# EAGLE board esquema (EAGLE 9.6.2)
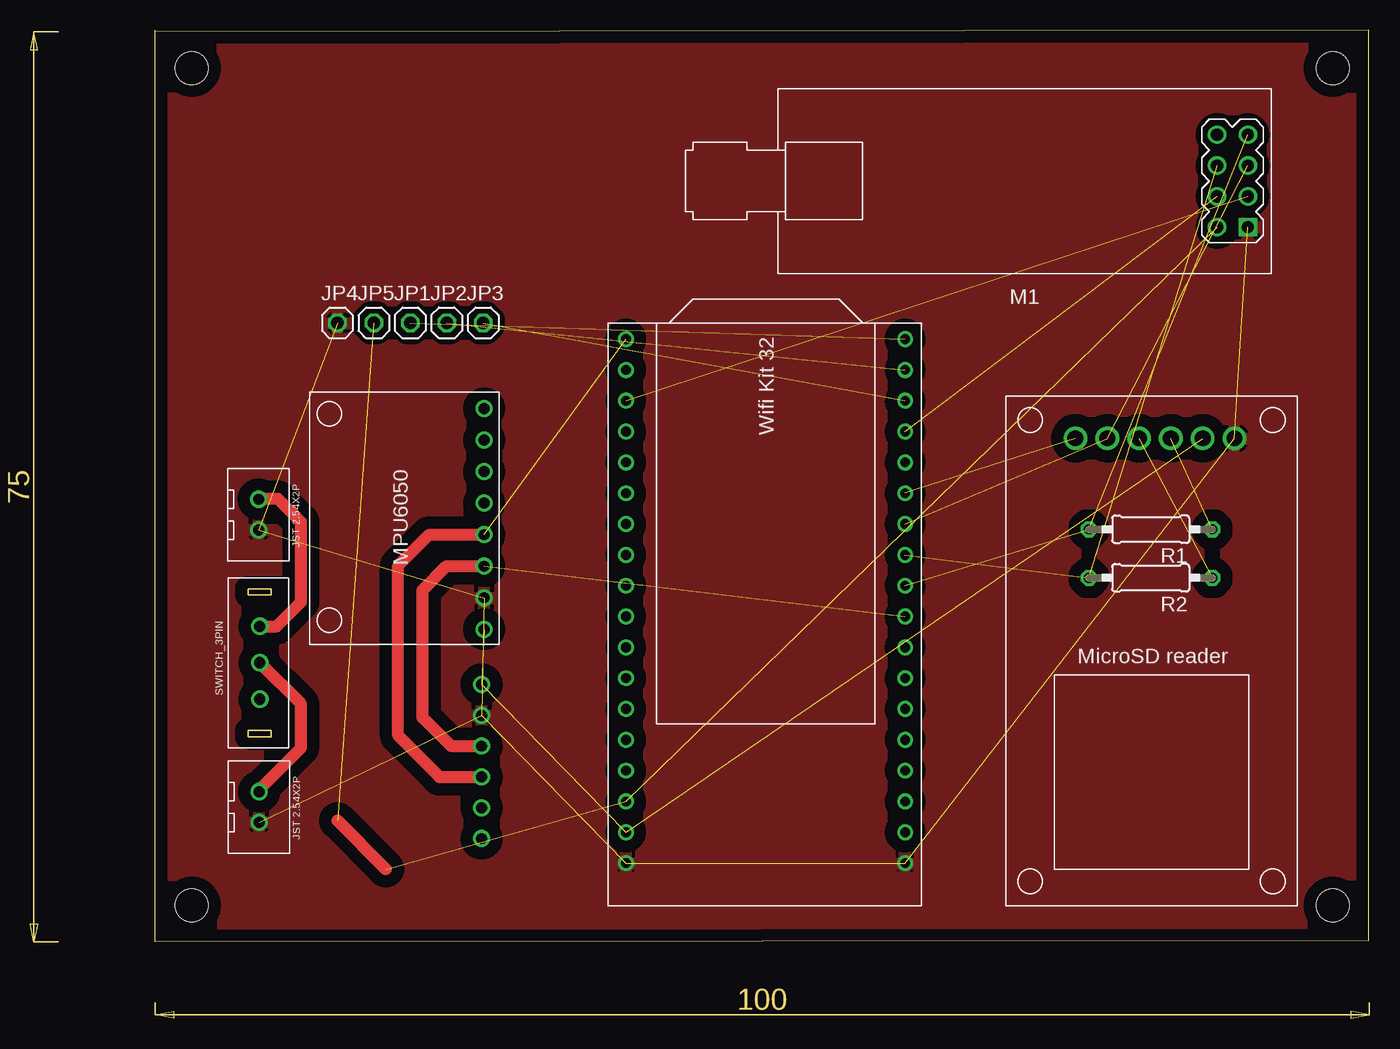
[diagram p0: board, top side]
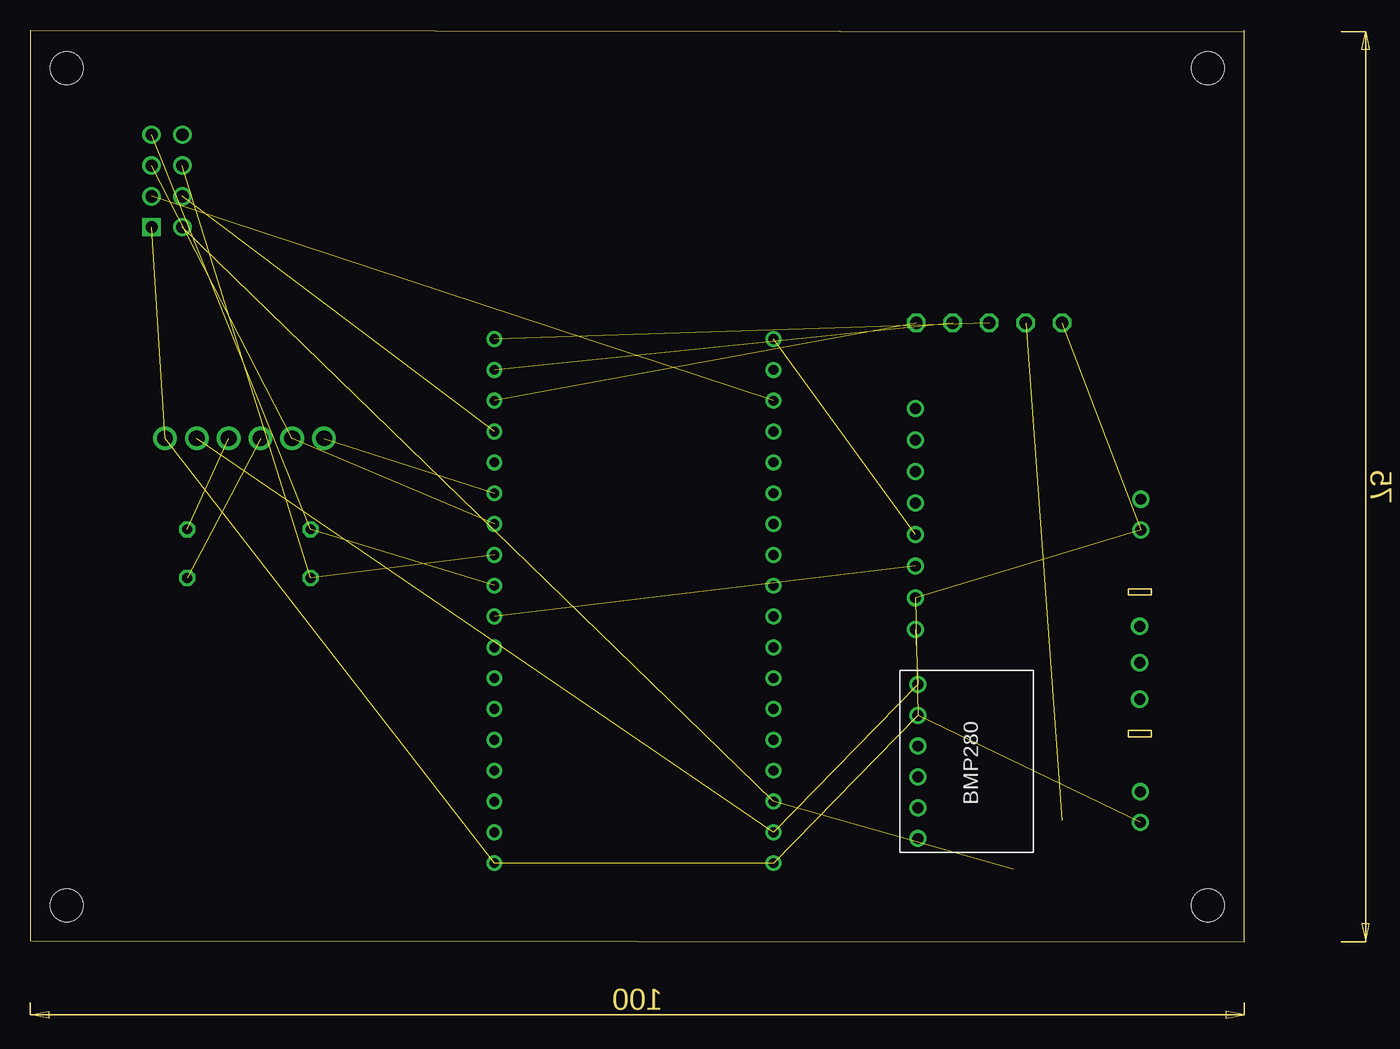
[diagram p1: board, bottom side, seen from below]

Size 100 x 75.1 mm. Coordinates in mm from the lower left corner, seen from the top.
Outline: 0.03,75 100,75.1 100,0.1 0.03,0
Outline: 0,0.01 0,75.1
Copper layers (1*16): Top 0.035mm / dielectric 1.5mm / Bottom 0.035mm
Design rules "default *": minimum track width 1mm, minimum drill 0.35mm, track to track 40mil, track to pad 0.5mm, pad to pad 6mil, via to via 6mil, smd to smd 6mil, copper to edge 40mil, drill to drill 6mil, minimum pad ring 10mil, minimum via ring 8mil, stop-mask expansion 4mil, vias tented up to drill 0mil, thermal gap 10mil
Holes 2.7 mm at 97.03,2.99 97.03,71.99 3.03,2.99 3.03,71.99

## Footprints (pad centres in the part's own frame; a part is rotated, then mirrored left to right if it is on the bottom)
1X01 = drill 1.016 octagon: 1 0,0
WIRELESS-NRF24L01-PA-EXT = drill 1 square: 1 -18.415,3.81 | drill 1: 2 -15.875,3.81; 3 -18.415,1.27; 4 -15.875,1.27; 5 -18.415,-1.27; 6 -15.875,-1.27; 7 -18.415,-3.81; 8 -15.875,-3.81
0207/10 = drill 0.813 octagon: 1 -5.08,0; 2 5.08,0
BMP280_FOOTPRINT = drill 0.891: CSB 3.686,-6.12; GND -3.934,-6.12; SCL -1.395,-6.12; SDA 1.145,-6.12; SDO 6.226,-6.12; VCC -6.474,-6.12
MICROSD_READER_FOOTPRINT = drill 1.3: CS 6.195,-14.534; GND -6.905,-14.534; MISO -1.665,-14.534; MOSI 0.955,-14.534; SCK 3.575,-14.534; VCC -4.285,-14.534
MPU6050_FOOTPRINT = drill 0.891: ADO 6.686,-10.184; GND -6.314,-10.184; INT 9.286,-10.184; SCL -3.715,-10.184; SDA -1.115,-10.184; VCC -8.915,-10.184; XCL 4.085,-10.184; XDA 1.486,-10.184
WIFI_KIT32 = drill 0.8: 0 -11.77,12.73; 2 -11.77,-5.05; 3V3_1 11.23,27.97; 3V3_2 11.23,25.43; 4 -11.77,-7.59; 5 -11.77,0.03; 5V -11.77,27.97; 12 11.23,-7.59; 13 11.23,-10.13; 14 11.23,-5.05; 15 -11.77,-2.51; 16 -11.77,-12.67; 17 -11.77,-10.13; 18 -11.77,2.57; 19 -11.77,7.65; 21 11.23,-12.67; 22 -11.77,10.19; 23 -11.77,5.11; 25 11.23,2.57; 26 11.23,0.03; 27 11.23,-2.51; 32 11.23,7.65; 33 11.23,5.11; 34 11.23,12.73; 35 11.23,10.19; 36 11.23,22.89; 37 11.23,20.35; 38 11.23,17.81; 39 11.23,15.27; GND_1 -11.77,30.51; GND_2 11.23,30.51; RST -11.77,15.27; RX -11.77,20.35; TX -11.77,17.81; VEXT_1 -11.77,25.43; VEXT_2 -11.77,22.89
JST2.54X2P_FOOTPRINT = drill 0.9: 1 -1.27,0; 2 1.27,0
SWITCH_3PIN = drill 0.93: 1 -3,-1.6; 2 0,-1.6; 3 3,-1.6

## Placement (x,y rotation side)
JP1  SKIB1  [1X01]  21.03,50.99 0 top
JP2  SKIB2  [1X01]  24.03,50.99 0 top
JP3  BUZZER  [1X01]  27.03,50.99 0 top
JP4  GND  [1X01]  15.03,50.99 0 top
JP5  3V3  [1X01]  18.03,50.99 0 top
M1  WIRELESS-NRF24L01-PA-EXT  [WIRELESS-NRF24L01-PA-EXT]  71.63,62.69 180 top
R1  330  [0207/10]  82.03,33.99 180 top
R2  330  [0207/10]  82.03,29.99 180 top
U$1  BMP280V1  [BMP280_FOOTPRINT]  20.78,14.73 270 bottom
U$2  MICROSD_READER  [MICROSD_READER_FOOTPRINT]  82.03,26.95 180 top
U$3  MPU6050V1  [MPU6050_FOOTPRINT]  16.93,34.66 90 top
U$4  WIFI_KIT32  [WIFI_KIT32]  50.03,36.99 180 top
U$5  JST2.54X2P  [JST2.54X2P_FOOTPRINT]  8.57,11.1 270 top
U$6  SWITCH_3PIN  [SWITCH_3PIN]  7.03,22.99 90 top
U$7  JST2.54X2P  [JST2.54X2P_FOOTPRINT]  8.53,35.19 270 top

## Library data of the parts
JP1-JP5 = pinhead
M1 = modules
R1 R2 = rcl; SPICEPREFIX: R
U$1-U$7 = CRD

## Nets
3V3_1: U$1.VCC U$2.VCC U$3.VCC U$4.3V3_1
3V3_2: JP5.1 M1.2 U$4.3V3_2
BUZZER: JP3.1 U$4.4
CE: M1.3 U$4.12
CSN_NRF: M1.4 U$4.2
GND: JP4.1 M1.1 U$1.GND U$2.GND U$3.GND U$4.GND_1 U$4.GND_2 U$5.2 U$7.2
MISO: M1.7 R1.2 U$4.19
MISO_SD: R1.1 U$2.MISO
MOSI: M1.6 R2.2 U$4.23
MOSI_SD: R2.1 U$2.MOSI
N$1: U$2.CS U$4.5
SCL: U$1.SCL U$3.SCL U$4.22
SCLK: M1.5 U$2.SCK U$4.18
SDA: U$1.SDA U$3.SDA U$4.21
SKIB1: JP1.1 U$4.16
SKIB2: JP2.1 U$4.17
V_BATTERY: U$5.1 U$6.2
VIN: U$6.3 U$7.1

## Tracks (layer width: path | path; a pad name or v marks a point on that pad's centre or on a via)
3V3_1  (3 unrouted)
3V3_2  (3 unrouted)
  Top 1: 19.03,5.99 15.03,9.99
BUZZER  (1 unrouted)
CE  (1 unrouted)
CSN_NRF  (1 unrouted)
GND  (8 unrouted)
  pour Top: 1.03,73.99 1.03,0.99 99.03,0.99 99.03,73.99
MISO  (2 unrouted)
MISO_SD  (1 unrouted)
MOSI  (2 unrouted)
MOSI_SD  (1 unrouted)
N$1  (1 unrouted)
SCL  (1 unrouted)
  Top 1: U$3.SCL 24.03,30.95 22.05,28.96 22.05,18.47 24.4,16.12 U$1.SCL
SCLK  (2 unrouted)
SDA  (1 unrouted)
  Top 1: U$1.SDA 23.44,13.59 20.03,16.99 20.03,30.99 22.59,33.55 U$3.SDA
SKIB1  (1 unrouted)
SKIB2  (1 unrouted)
V_BATTERY
  Top 1: U$5.1 8.7,12.66 12.03,15.99 12.03,19.59 U$6.2
VIN
  Top 1: U$6.3 10.03,25.99 12.03,27.99 12.03,34.59 10.13,36.49 8.56,36.49 U$7.1